# EAGLE board MagAltBreakout (EAGLE 9.2.2)
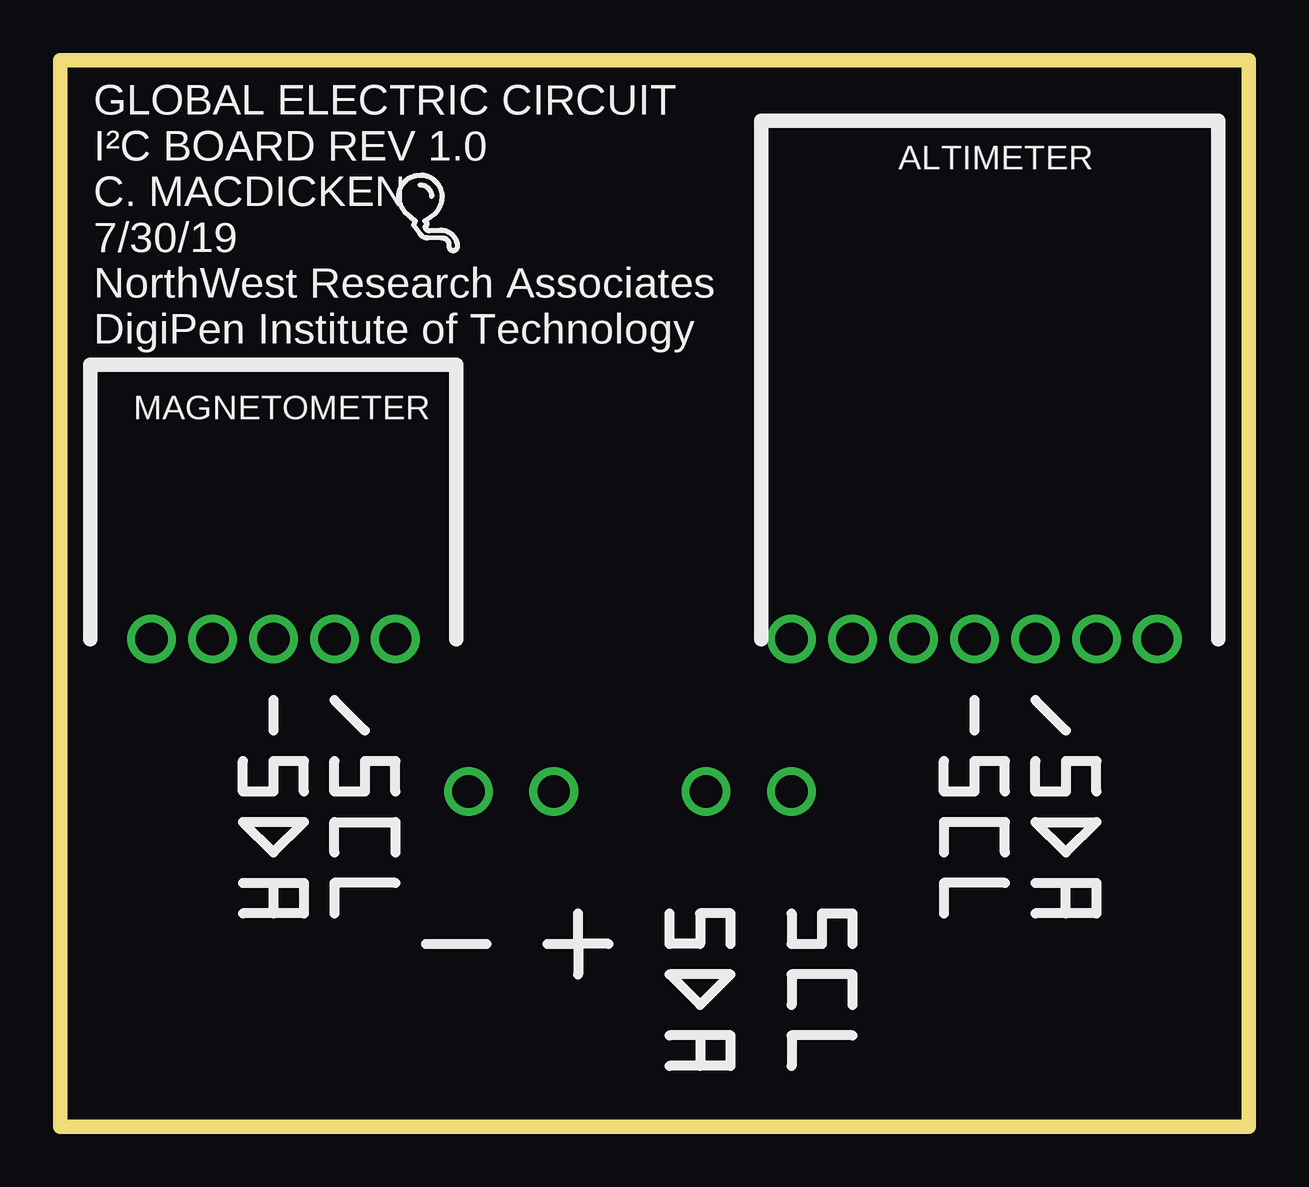
[diagram p0: board, top side]
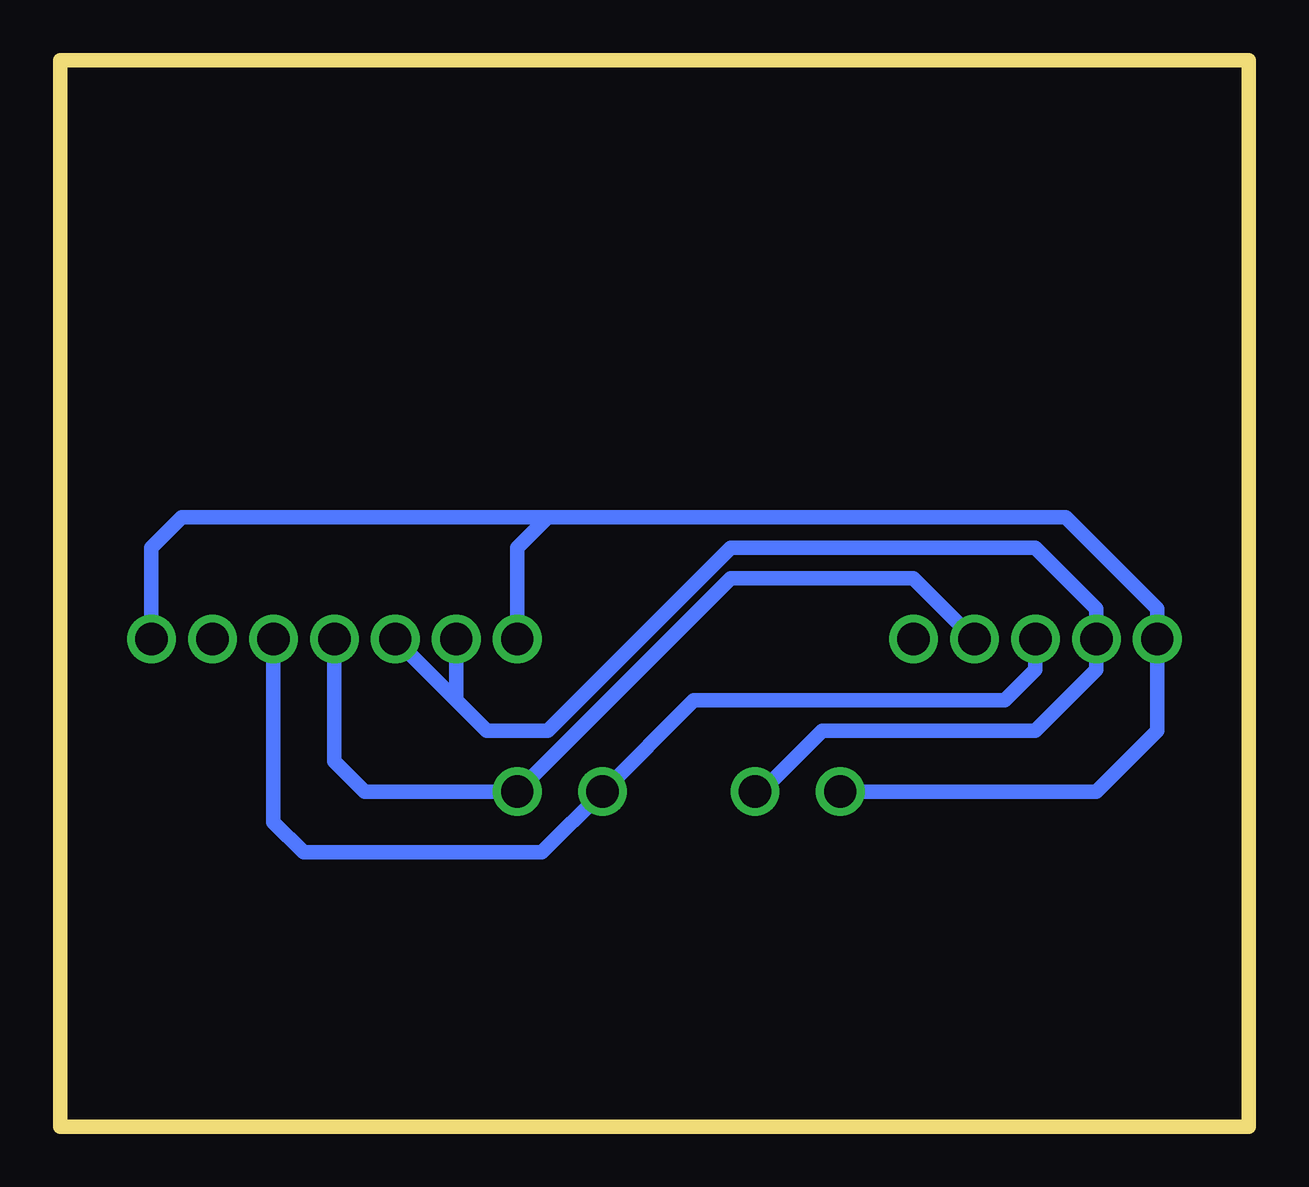
[diagram p1: board, bottom side, seen from below]

Size 49.53 x 44.45 mm. Coordinates in mm from the lower left corner, seen from the top.
Copper layers (1*16): Top 0.035mm / dielectric 1.5mm / Bottom 0.035mm
Design rules "default": minimum track width 6mil, minimum drill 0.35mm, track to track 6mil, track to pad 6mil, pad to pad 6mil, via to via 6mil, smd to smd 6mil, copper to edge 40mil, drill to drill 6mil, minimum pad ring 10mil, minimum via ring 8mil, stop-mask expansion 4mil, vias tented up to drill 0mil, thermal gap 10mil

## Placement (x,y rotation side)
U$5  [BALLOON]  14.96,38.5 0 top

## Library data of the parts
U$5 = Logos

## Tracks (layer width: path | path; a pad name or v marks a point on that pad's centre or on a via)
C6  (via drill 1.35)
  other vias: 43.18,20.32
GND  (via drill 1.35)
  Bottom 0.61: v17.02,13.97 6.35,13.97 3.81,16.51 v3.81,20.32 3.81,21.59 7.62,25.4 29.21,25.4 | 29.21,25.4 30.48,24.13 v30.48,20.32 | 29.21,25.4 44.45,25.4 45.72,24.13 v45.72,20.32
INT  (via drill 1.35)
  other vias: 13.97,20.32
SCL  (via drill 1.35)
  Bottom 0.61: v38.1,20.32 38.1,15.24 36.83,13.97 v30.48,13.97 21.59,22.86 13.97,22.86 v11.43,20.32
SDA  (via drill 1.35)
  Bottom 0.61: v8.89,20.32 8.89,19.05 10.16,17.78 23.11,17.78 v26.92,13.97 29.46,11.43 39.37,11.43 40.64,12.7 v40.64,20.32
VCC  (via drill 1.35)
  Bottom 0.61: 33.02,17.78 31.75,16.51 29.21,16.51 21.59,24.13 8.89,24.13 6.35,21.59 v6.35,20.32 6.35,19.05 8.89,16.51 17.78,16.51 20.32,13.97 v20.57,13.97 | 33.02,17.78 v33.02,20.32 | 33.02,17.78 v35.56,20.32

## Text on the board
tPlace: GLOBAL ELECTRIC CIRCUIT / I²C BOARD REV 1.0 / C. MACDICKEN / 7/30/19 / NorthWest Research Associates / DigiPen Institute of Technology | ALTIMETER | MAGNETOMETER